# EAGLE board shield (EAGLE 6.5.0)

No outline drawn. Coordinates in mm, seen from the top.
Copper layers (1*16): Top 0.035mm / dielectric 1.5mm / Bottom 0.035mm
Design rules "default": minimum track width 10mil, minimum drill 24mil, track to track 8mil, track to pad 8mil, pad to pad 8mil, via to via 8mil, smd to smd 8mil, copper to edge 40mil, drill to drill 8mil, minimum pad ring 10mil, minimum via ring 8mil, stop-mask expansion 4mil, vias tented up to drill 0mil, thermal gap 10mil

## Footprints (pad centres in the part's own frame; a part is rotated, then mirrored left to right if it is on the bottom)
0805 = smd 0.8 x 1.2: 1 -0.9,0; 2 0.9,0
UNO_R3_SHIELD = drill 1.016 pad 1.88: 3.3V 50.8,26.67; 5V 50.8,29.21; A0 50.8,41.91; A1 50.8,44.45; A2 50.8,46.99; A3 50.8,49.53; A4 50.8,52.07; A5 50.8,54.61; AREF 2.54,15.24; D2 2.54,49.53; D3 2.54,46.99; D4 2.54,44.45; D5 2.54,41.91; D6 2.54,39.37; D7 2.54,36.83; D8 2.54,33.02; D9 2.54,30.48; D10 2.54,27.94; D11 2.54,25.4; D12 2.54,22.86; D13 2.54,20.32; GND@0 50.8,31.75; GND@1 50.8,34.29; GND@2 2.54,17.78; IOREF 50.8,21.59; NC 50.8,19.05; RES 50.8,24.13; RX 2.54,54.61; SCL 2.54,10.16; SDA 2.54,12.7; TX 2.54,52.07; VIN 50.8,36.83
POWER_JACK_SMD = smd 2.8 x 2.4: GND 0,-5.7; P$4 6.1,-5.7; VIN0 0,5.7; VIN1 6.1,5.7 | hole 2.032: 0,0; 4.572,0
SCREWTERMINAL-3.5MM-4 = drill 1.2 pad 2.032 square: 1 0,0 | drill 1.2 pad 2.032: 2 3.5,0; 3 7,0; 4 10.5,0
SCREWTERMINAL-3.5MM-3 = drill 1.2 pad 2.413 square: 1 0,0 | drill 1.2 pad 2.413: 2 3.5,0; 3 7,0
0603-RES = smd 1.1 x 1: 1 -0.85,0; 2 0.85,0
0603-ARV = smd 0.5 x 0.65: 1 -1.2,-0.625; 2 -0.4,-0.625; 3 0.4,-0.625; 4 1.2,-0.625; 5 1.2,0.625; 6 0.4,0.625; 7 -0.4,0.625; 8 -1.2,0.625
SOT23-5 = smd 0.55 x 1.2: 1 -0.95,-1.3; 2 0,-1.3; 3 0.95,-1.3; 4 0.95,1.3; 5 -0.95,1.3
QFN50P500X500X100-29N = smd 1.067 x 0.305: 1 -2.362,1.499; 2 -2.362,0.991; 3 -2.362,0.508; 4 -2.362,0; 5 -2.362,-0.508; 6 -2.362,-0.991; 7 -2.362,-1.499; 15 2.362,-1.499; 16 2.362,-0.991; 17 2.362,-0.508; 18 2.362,0; 19 2.362,0.508; 20 2.362,0.991; 21 2.362,1.499 | smd 0.305 x 1.067: 8 -1.499,-2.362; 9 -0.991,-2.362; 10 -0.508,-2.362; 11 0,-2.362; 12 0.508,-2.362; 13 0.991,-2.362; 14 1.499,-2.362; 22 1.499,2.362; 23 0.991,2.362; 24 0.508,2.362; 25 0,2.362; 26 -0.508,2.362; 27 -0.991,2.362; 28 -1.499,2.362 | smd 3.15 x 3.15: 29 0,0
SO08-EIAJ = smd 0.61 x 2.21: 1 -1.905,-3.378; 2 -0.635,-3.378; 3 0.635,-3.378; 4 1.905,-3.378; 5 1.905,3.353; 6 0.635,3.353; 7 -0.635,3.353; 8 -1.905,3.353

## Placement (x,y rotation side)
C1  2.2uF  [0805]  29.21,24.13 90 top
C2  1.0uF  [0805]  19.05,13.97 0 top
J1  ARDUINO_R3_SHIELD  [UNO_R3_SHIELD]  0,0 0 top
JP1  5.5x2.1mm Barrel  [POWER_JACK_SMD]  40.64,5.08 90 top
JP2  [SCREWTERMINAL-3.5MM-4]  17.78,55.88 180 top
JP3  [SCREWTERMINAL-3.5MM-4]  44.45,55.88 180 top
JP4  [SCREWTERMINAL-3.5MM-3]  15.24,5.08 0 top
R1  10K  [0603-RES]  8.89,15.24 270 top
R2  POTENTIOMETER  [0603-ARV]  27.94,17.78 90 top
U1  [SOT23-5]  38.1,24.13 180 top
U2  A4988SETTR-T  [QFN50P500X500X100-29N]  17.78,39.37 0 top
U3  A4988SETTR-T  [QFN50P500X500X100-29N]  36.83,39.37 0 top
U4  Tiny45-20-SMT  [SO08-EIAJ]  17.78,24.13 90 top

## Library data of the parts
C1 = SparkFun-Capacitors; PROD_ID: CAP-11624
C2 = SparkFun-Capacitors; PROD_ID: CAP-11625
J1 = SparkFun-Boards
JP1 = SparkFun-Connectors; PROD_ID: CONN-08106
JP2-JP4 = SparkFun-Connectors
R1 = SparkFun-Resistors; PROD_ID: RES-00824
R2 = SparkFun-Passives
U1 = SparkFun-PowerIC; PROD_ID: VREG-00823
U2 U3 = Allegro_By_element14_Batch_1; MPN: A4988SETTR-T; OC_FARNELL: -; OC_NEWARK: 67R9678; PACKAGE: QFN-28; SUPPLIER: Allegro
U4 = SparkFun-DigitalIC; PROD_ID: IC-08922

## Nets
5V: C1.1 C2.1 JP4.2 R2.1 U1.5 U2.8 U3.8 U4.8
12V: JP1.VIN0 U1.1 U1.3 U2.15 U3.15
GND: C1.2 C2.2 J1.GND@0 JP1.P$4 JP4.3 R1.2 R2.2 U1.2 U2.18 U3.18 U4.4
N$1: JP2.1 U2.24
N$2: JP2.2 U2.21
N$3: JP2.3 U2.26
N$4: JP2.4 U2.1
N$5: JP3.1 U3.24
N$6: JP3.2 U3.21
N$7: JP3.3 U3.26
N$8: JP3.4 U3.1
N$9: J1.D2 U2.16
N$10: J1.D5 U2.19
N$11: J1.D3 U3.16
N$12: J1.D6 U3.19
N$13: J1.D13 R1.1 U4.5
N$14: JP4.1 U4.6
N$15: R2.3 R2.4 R2.5 R2.6 R2.7 R2.8 U4.7
VBB1: U2.22 U3.22
VBB2: U2.28 U3.28

## Tracks (layer width: path | path; a pad name or v marks a point on that pad's centre or on a via)
5V  (7 unrouted)
12V  (4 unrouted)
GND  (10 unrouted)
N$1  (1 unrouted)
N$2  (1 unrouted)
N$3  (1 unrouted)
N$4  (1 unrouted)
N$5  (1 unrouted)
N$6  (1 unrouted)
N$7  (1 unrouted)
N$8  (1 unrouted)
N$9  (1 unrouted)
N$10  (1 unrouted)
N$11  (1 unrouted)
N$12  (1 unrouted)
N$13  (2 unrouted)
N$14  (1 unrouted)
N$15  (6 unrouted)
VBB1  (1 unrouted)
VBB2  (1 unrouted)